# Altium PCB Soldering_Iron.PcbDoc
Units mm, origin at the board's own origin, x right, y up, seen from the top; angles counter-clockwise.
Board outline 141.5 x 41.5 mm, 2 copper layers (Top Layer, Bottom Layer); 49 components, 42 nets, 176 pads, 22 vias.
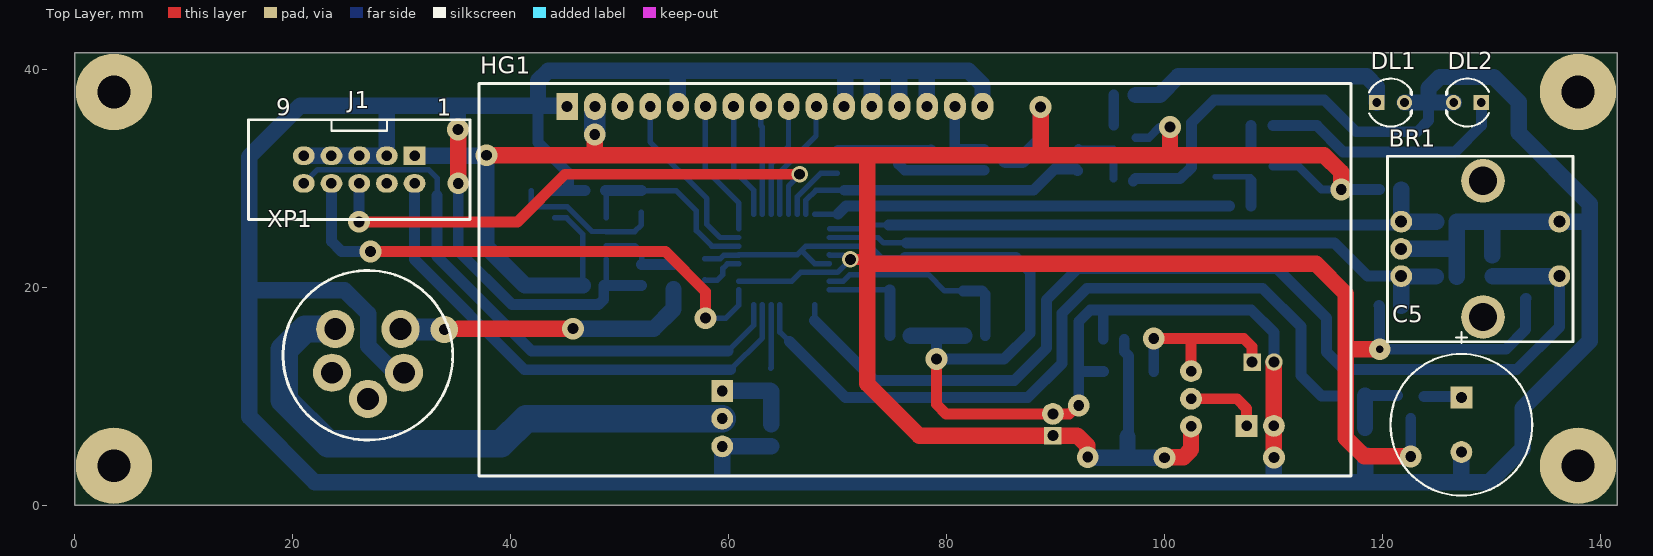
[diagram p0: Top Layer view]
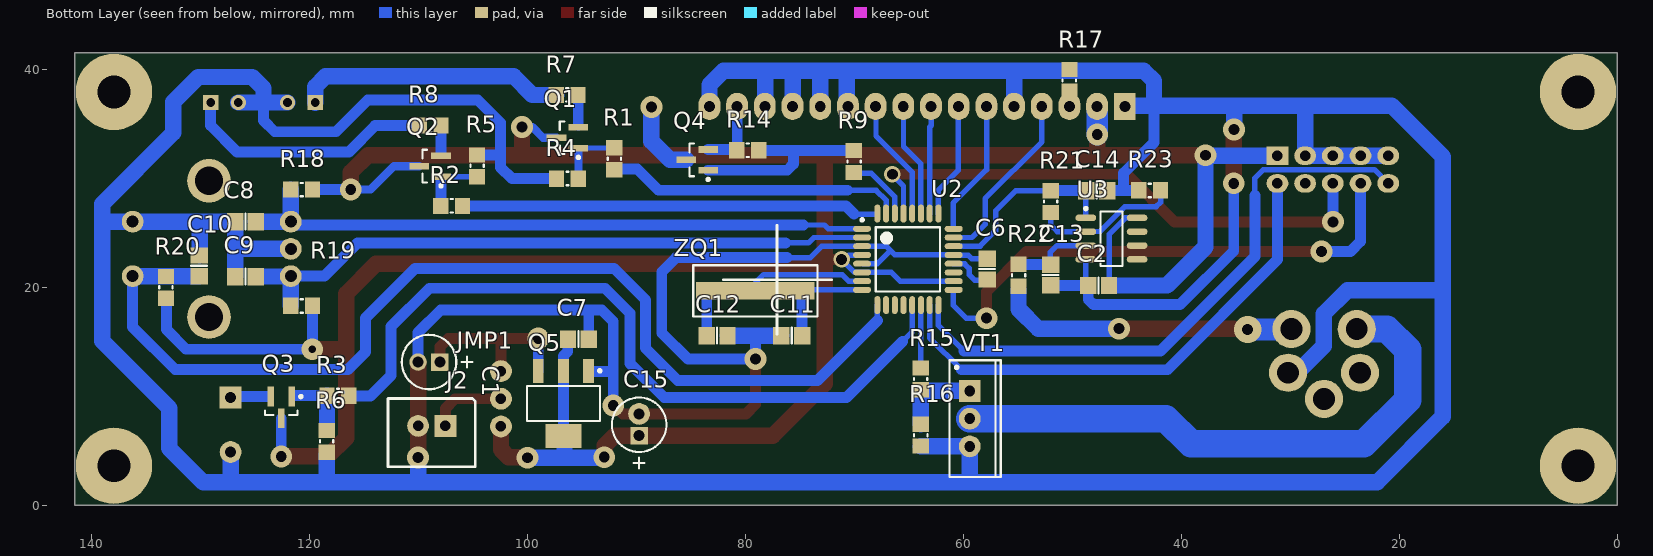
[diagram p1: Bottom Layer view, seen from below]
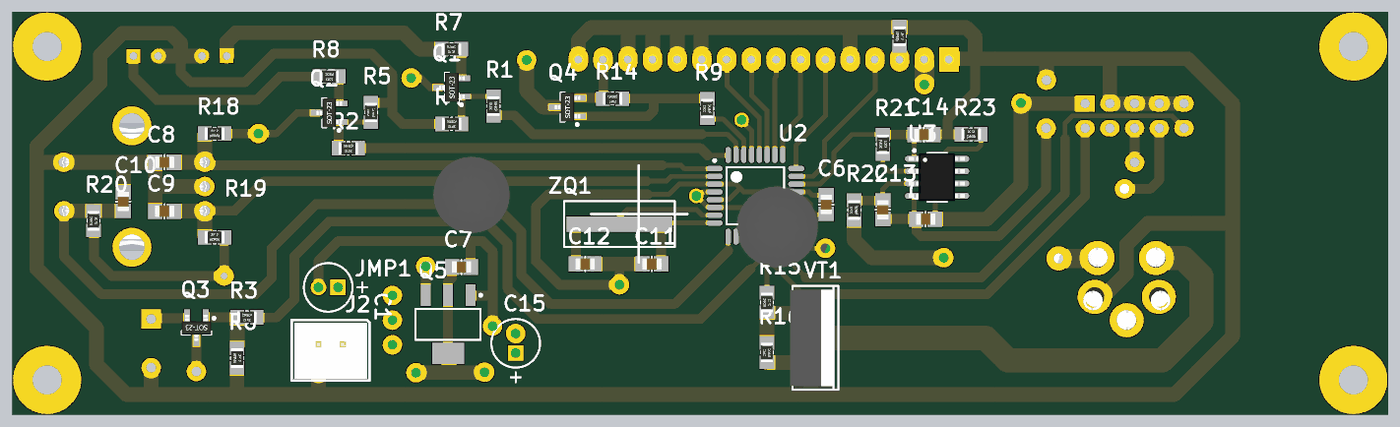
[diagram p2: 3D render of the assembled board from below, using the file's embedded part models]

## Layer stack, top to bottom
Top Solder: solder mask 0.0102, Solder Resist, Dk 3.5
Top Layer: signal copper 0.0356
Dielectric 1: dielectric 0.32, FR-4, Dk 4.8
Bottom Layer: signal copper 0.0356
Bottom Solder: solder mask 0.0102, Solder Resist, Dk 3.5

## Board outline
0,0 141.5,0 141.5,41.5 0,41.5

## Design rules (kind name [scope] priority, off if disabled: settings)
Clearance "Schematic Clearance Constraint" [InNet('NetVT1_2')] p1: gap=0.125 ignorepadtopadclearanceinfootprint=FALSE
Clearance [All] p2: gap=0.125 ignorepadtopadclearanceinfootprint=FALSE
HoleSize [All] p1: absolutevalues=TRUE maxlimit=5 minlimit=0.025 maxpercent=80.000 minpercent=20.000
HoleToHoleClearance [All] p1: gap=0.15 allowstackedmicrovias=TRUE
PolygonConnect [All] p1: connectstyle=Relief reliefconductorwidth=0.254 reliefentries=4 polygonreliefangle="90 Angle" airgapwidth=0.254
RoutingVias [All] p1: holewidth=0.711 width=1.27 viastyle="Through Hole" minholewidth=0.711 minwidth=1.27 maxholewidth=0.711 maxwidth=1.27
SolderMaskExpansion [All] p1: expansion=0.102
Width PWR [InNet('NetVT1_2')] p1: maxlimit=5 minlimit=1 preferedwidth=2
Width [All] p2: maxlimit=10 minlimit=0.125 preferedwidth=1
28 further rules are at their usual default settings.

## Classes and differential pairs
net class PWR: +5 GND NetVT1_2 VCC
component class Sheet_Soldering_Iron: BR1 C1 C6 C7 C8 C9 C10 C11 C12 C15 J1 J2 JMP1 Q5 R17 R18 R19 R20 U2 ZQ1
component class Led_And_Sound: DL2 Q1 Q2 Q3 Q4 R1 R2 R3 R4 R5 R6 R7 R8 R9 R14 R15 R16 VT1
component class Amplifier_For_Term: C2 C13 C14 R21 R22 R23 U3

## Components (designator, comment, footprint, x,y, rotation, side; value= is the part's Value field where it differs from the comment)
BR1 "Encoder" PCBComponent_1#1 129.18,23.5 r270 top
C1 "ECAP-511" ECAP511#1 108,13.12 r0 bottom value=100uF
C2 "CAPC_0805" CAPC2012-0805M 47.575,20.145 r180 bottom value=0.1uF
C5 "ECAP-1325" ECAP1325 127.2,9.87 r270 top value=1uF
C6 "CAPC_0805" CAPC2012-0805M 57.8,21.645 r270 bottom value=0.1uF
C7 "CAPC_0805" CAPC2012-0805M 95.3,15.22 r0 bottom value=0.1uF
C8 "CAPC_0805" CAPC2012-0805M 125.83,26 r180 bottom value=10nF
C9 "CAPC_0805" CAPC2012-0805M 125.83,20.95 r180 bottom value=10nF
C10 "CAPC_0805" CAPC2012-0805M 130.075,21.95 r270 bottom value=10nF
C11 "CAPC_0805" CAPC2012-0805M 75.725,15.545 r180 bottom value=22pF
C12 "CAPC_0805" CAPC2012-0805M 82.575,15.545 r0 bottom value=22pF
C13 "CAPC_0805" CAPC2012-0805M 51.975,21.107 r90 bottom value=0.1uF
C14 "CAPC_0805" CAPC2012-0805M 47.75,28.845 r0 bottom value=0.1uF
C15 "ECAP-511" ECAP511#2 89.725,6.37 r90 bottom value=10uF
DL1 "LED_D3_TH" LED_D3_TH 119.435,36.92 r0 top value=Red
DL2 "LED_D3_TH" LED_D3_TH 129.025,36.923 r180 top value=Red
HG1 "дисплей 16 сиволов на 2 строки" PCBComponent_1#2 77.075,20.67 r0 top
J1 "IDC10-2.54-SB" IDC10-2.54-SB 33.715,34.585 r0 top
J2 "CWF-2" CWF-2 107.5,7.27 r270 bottom
JMP1 "JMP3_2.54" JMP3_2.54 102.4,12.295 r180 bottom
Q1 "BC817" SOT23-3M 96.3,33.695 r0 bottom
Q2 "BC817" SOT23-3M 108.901,31.09 r0 bottom
Q3 "BC817" SOT23-3M 122.55,8.957 r270 bottom
Q4 "BC817" SOT23-3M 84.4,31.67 r0 bottom
Q5 "BCP56" SOT223_N 96.675,9.32 r270 bottom
R1 "RESC_0805_R" RESC2012-0805M 92,31.77 r90 bottom value=1k
R2 "RESC_0805_R" RESC2012-0805M 106.925,27.44 r0 bottom value=1k
R3 "RESC_0805_R" RESC2012-0805M 117.35,10.045 r0 bottom value=1k
R4 "RESC_0805_R" RESC2012-0805M 96.3,29.945 r0 bottom value=1k
R5 "RESC_0805_R" RESC2012-0805M 104.6,31.115 r90 bottom value=1k
R6 "RESC_0805_R" RESC2012-0805M 118.375,5.845 r270 bottom value=1k
R7 "RESC_0805_R" RESC2012-0805M 96.325,37.62 r0 bottom value=1k
R8 "RESC_0805_R" RESC2012-0805M 108.901,34.815 r0 bottom value=1k
R9 "RESC_0805_R" RESC2012-0805M 70.025,31.52 r90 bottom value=1k
R14 "RESC_0805_R" RESC2012-0805M 79.762,32.537 r0 bottom value=1k
R15 "RESC_0805_R" RESC2012-0805M 63.9,11.57 r270 bottom value=100
R16 "RESC_0805_R" RESC2012-0805M 63.9,6.42 r90 bottom value=1k
R17 "RESC_0805_R" RESC2012-0805M 50.255,38.954 r270 bottom value=2k
R18 "RESC_0805_R" RESC2012-0805M 120.68,28.95 r180 bottom value=100k
R19 "RESC_0805_R" RESC2012-0805M 120.675,18.275 r180 bottom value=100k
R20 "RESC_0805_R" RESC2012-0805M 133.125,19.975 r270 bottom value=100k
R21 "RESC_0805_R" RESC2012-0805M 51.975,27.845 r270 bottom value=130k
R22 "RESC_0805_R" RESC2012-0805M 54.925,21.082 r90 bottom value=10k
R23 "RESC_0805_R" RESC2012-0805M 42.9,28.87 r180 bottom value=1k
U2 "ATmega88A-AU" 32A_N 65.075,22.545 r180 bottom
U3 "LM358AM" SO-8_L 46.4,24.445 r180 bottom
VT1 "IRFZ48" TO-220 59.4,7.93 r270 bottom
XP1 "Connector" PCBComponent_1#3 26.9,13.745 r0 top
ZQ1 "Quartz HC49SMD" HC-49SMD 79.065,19.645 r0 bottom value=14.74M

## Footprints (in the part's own frame and the unit in brackets; to place one, negate y for a bottom-side part, rotate by r counter-clockwise, add the part's x,y. Pads: shape width x height; smd on the part's side, far side on the other; paste and mask are expansions set on the pad)
32A_N [mm] "Thin QFP, 32-Leads, Body 7x7mm, Pitch 0.8mm, IPC Medium Density"
  oval 1.65x0.55 smd: 1(-4.2,2.8) 2(-4.2,2) 3(-4.2,1.2) 4(-4.2,0.4) 5(-4.2,-0.4) 6(-4.2,-1.2) 7(-4.2,-2) 8(-4.2,-2.8) 17(4.2,-2.8) 18(4.2,-2) 19(4.2,-1.2) 20(4.2,-0.4) 21(4.2,0.4) 22(4.2,1.2) 23(4.2,2) 24(4.2,2.8)
  oval 0.55x1.65 smd: 9(-2.8,-4.2) 10(-2,-4.2) 11(-1.2,-4.2) 12(-0.4,-4.2) 13(0.4,-4.2) 14(1.2,-4.2) 15(2,-4.2) 16(2.8,-4.2) 25(2.8,4.2) 26(2,4.2) 27(1.2,4.2) 28(0.4,4.2) 29(-0.4,4.2) 30(-1.2,4.2) 31(-2,4.2) 32(-2.8,4.2)
  silkscreen extent -4.33,-2.95 2.95,3.75, body extent -3.5,-3.5 3.5,3.5, height 1.2
CAPC2012-0805M [mm] "Chip Capacitor, Body 2.0x1.3mm, IPC Low Density"
  rect 1.5x1.6 smd: 1(-0.95,0) 2(0.95,0)
  silkscreen extent 0,-0.72 0,0.72, body extent -1,-0.6 1,0.6, height 0.95
CWF-2 [mm]
  rect 2x2 hole 0.965: 1(0,0)
  round 2 hole 0.965: 2(0,-2.5)
  silkscreen extent -2.5,-5.25 3.75,2.75, body extent -2.2,-5 3.55,2.5, height 7
ECAP511#1 [mm] "Electrolytic capacitor D 5mm H 11mm"
  rect 1.6x1.6 hole 1: 1(0,0)
  round 1.6 hole 1: 2(2,0)
  silkscreen extent -3,-2.5 3.5,2.5, body extent -1.51,-2.49 3.49,2.5, height 11
ECAP511#2 [mm] "Electrolytic capacitor D 5mm H 11mm"
  rect 1.6x1.6 hole 1: 1(0,0)
  round 2 hole 1: 2(2,0)
  silkscreen extent -3,-2.5 3.5,2.5, body extent -1.51,-2.49 3.49,2.5, height 11
ECAP1325 [mm] "Electrolytic capacitor D 13mm H 25mm"
  rect 2x2 hole 1: 1(0,0)
  round 2 hole 1: 2(5,0)
  silkscreen extent -6,-6.5 9,6.5, body extent -4.05,-6.51 8.95,6.49, height 25
HC-49SMD [mm] "Quartz Crystal, SMT; 2 Leads; Body 11.35 x 4.65 x 13.46 mm (LxWxH max)"
  rect 6x1.6 smd: 1(-2.44,0) 2(2.44,0)
  silkscreen extent -5.7,-2.35 5.7,2.35, body extent -5.75,-2.25 5.75,2.25, height 4
IDC10-2.54-SB [mm] "IDC10 2.54 mm pitch, Straight, plastic Box"
  rect 2x1.7 hole 0.965: 1(-2.54,-2.54)
  oval 2x1.7 hole 0.965: 2(-2.54,-5.08) 3(-5.08,-2.54) 4(-5.08,-5.08) 5(-7.62,-2.54) 6(-7.62,-5.08) 7(-10.16,-2.54) 8(-10.16,-5.08) 9(-12.7,-2.54) 10(-12.7,-5.08)
  silkscreen extent -17.78,-8.38 2.54,0.76, body extent -17.78,-8.38 2.54,0.76, height 8.38
JMP3_2.54 [mm] "2 way jumper 2.54 mm"
  round 2 hole 0.965: 1(0,0) 2(0,-2.54) 3(0,-5.08)
  body extent -1.27,-6.35 1.27,1.27, height 7.62
LED_D3_TH [mm] "Through hole LED"
  rect 1.4x1.4 hole 0.8: 1(0,0)
  round 1.4 hole 0.8: 2(2.54,0)
  silkscreen extent -0.71,-2.2 3.24,2.2, body extent -0.33,-1.6 2.87,1.6, height 6.6
PCBComponent_1#1 [mm]
  round 2 hole 1.1: 1(-2.5,-7.5) 2(0,-7.5) 3(2.5,-7.5) 4(-2.5,7) 5(2.5,7)
  round 4 hole 2.6: HOLE(-6.25,0) HOLE(6.25,0)
  silkscreen extent -8.5,-8.75 8.52,8.25, body extent -6.55,-7.73 6.55,11, height 32.6
PCBComponent_1#2 [mm]
  rect 2x2.5 hole 1: 1(-31.9,15.9)
  oval 2x2.5 hole 1: 2(-29.36,15.9) 3(-26.82,15.9) 4(-24.28,15.9) 5(-21.74,15.9) 6(-19.2,15.9) 7(-16.66,15.9) 8(-14.12,15.9) 9(-11.58,15.9) 10(-9.04,15.9) 11(-6.5,15.9) 12(-3.96,15.9) 13(-1.42,15.9) 14(1.12,15.9) 15(3.66,15.9) 16(6.2,15.9)
  silkscreen extent -40,-18 40,18, body extent -39.88,-18.03 40.12,17.97, height 11.05
PCBComponent_1#3 [mm]
  round 3.5 hole 2: 1(-3,2.4) 2(-3.3,-1.6) 3(0,-4) 4(3.3,-1.6) 5(3,2.4)
  silkscreen extent -7.78,-7.78 7.78,7.78, body extent -9.5,-10.97 9.5,10.97, height 17
RESC2012-0805M [mm] "Chip Resistor, Body 2.0x1.3mm, IPC Low Density"
  rect 1.4x1.5 smd: 1(-1,0) 2(1,0)
  silkscreen extent -0.1,-0.63 0.1,0.6, body extent -1,-0.62 1,0.63, height 0.45
SO-8_L [mm] "SOIC, 8-Leads, Body 4.9x3.9mm, Pitch 1.27mm, IPC High Density"
  oval 1.9x0.6 smd: 1(-2.35,1.905) 2(-2.35,0.635) 3(-2.35,-0.635) 4(-2.35,-1.905) 5(2.35,-1.905) 6(2.35,-0.635) 7(2.35,0.635) 8(2.35,1.905)
  silkscreen extent -2.48,-2.5 1,2.88, body extent -2.9,-2.44 2.88,2.46, height 1.45
SOT23-3M [mm] "SOT23, 3-Leads, Body 2.9x1.3mm, Pitch 0.95mm, Lead Span 2.5mm, IPC Low Density"
  rect 1.8x0.6 smd: 1(-1,0.95) 2(-1,-0.95) 3(1,0)
  silkscreen extent -1.12,-1.5 0.7,1.92, body extent -1.32,-1.5 1.32,1.5, height 1.08
SOT223_N [mm] "SOT223, 4-Leads, Body 6.5x3.5mm, Pitch 2.3mm, Lead Span 7mm, IPC Medium Density"
  rect 2.2x1 smd: 1(-3,2.3) 2(-3,0) 3(-3,-2.3)
  rect 2.2x3.3 smd: 4(3,0)
  silkscreen extent -3.12,-3.35 1.6,3.47, body extent -1.85,-3.35 1.85,3.35, height 1.8
TO-220 [mm] "TO, Thru-Hole, Vertical, Heatsink Mounted; 3 In-Line Leads; Pitch 2.54 mm"
  rect 2x2 hole 1: 1(-2.54,0)
  round 2 hole 1: 2(0,0) 3(2.54,0)
  silkscreen extent -5.35,-1.85 5.35,2.85, body extent -4.95,-2.11 4.95,2.39, height 22.8

## Part data
BR1: library part EC11, "Энкодер с кнопкой"
C1 C15: "Capacitor electrolytic 2.5 mm pitch, 5*11 body"
C2 C6 C7 C8 C9 C10 C11 C12 C13 C14: "Capacitor 0805"
C5: "Capacitor electrolytic 5 mm pitch, 13*25 body"
DL1 DL2: "LED Through hole D3mm"
HG1: library part LCD1602, HelpURL=https://cdn-shop.adafruit.com/datasheets/TC1602A-01T.pdf
J1: "IDC10 2.54 mm pitch Straight, plastic Box", LatestRevisionDate=17-Jul-2002, LatestRevisionNote="Re-released for DXP Platform.", Publisher="Altium Limited"
JMP1: "2.54mm 3-pin \"switching\" jumper"
Q1 Q2 Q3 Q4: "BC817 NPN Transistor"
Q5: "NPN Medium Power Transistor", ComponentLink1Description="Manufacturer Link", ComponentLink1URL=http://www.semiconductors.philips.com/, ComponentLink2Description=Datasheet, ComponentLink2URL=http://www.semiconductors.philips.com/acrobat/datasheets/BC639_BCP56_BCX56_7.pdf, DatasheetVersion=10-Oct-2001, LatestRevisionDate=12-Dec-2006, LatestRevisionNote="IPC-7351 Footprint Added.", PackageDescription="4-Pin SOT-223 Package 2.3 mm Pitch, 7 mm Lead Span", PackageReference=SOT223, PackageVersion=Aug-2001, Published=17-Sep-2003, Publisher="Altium Limited"
R1 R2 R3 R4 R5 R6 R7 R8 R9 R14 R15 R16 R17 R18 R19 R20 R21 R22 R23: "Resistor 0805"
U2: "8-bit AVR Microcontroller, 8KB Flash, 512 Bytes EEPROM, 1KB SRAM, 32-pin TQFP, Industrial Grade (-40°C to 85°C)", Supplier Part Number 1=ATMEGA88A-AU-ND, Code_JEDEC=MS-026-ABA, ComponentLink1Description="Manufacturer Link", ComponentLink1URL=http://www.atmel.com/products/avr/default.asp?, ComponentLink2Description="ATmega48A/48PA/88A/88PA/168A/168PA/328/328P Datasheet", ComponentLink2URL=http://www.atmel.com/dyn/resources/prod_documents/8271.pdf, ComponentLink3Description="ATmega48A/48PA/88A/88PA/168A/168PA/328/328P Summary", ComponentLink3URL=http://www.atmel.com/dyn/resources/prod_documents/8271S.pdf, ComponentLink4Description="Atmel.com Home", ComponentLink4URL=http://www.atmel.com, DatasheetVersion="revA, Jan-2010", PackageDescription="32-Lead, 7x7x1.0 mm Body, 0.8mm Lead Pitch, Thin Profile Plastic Quad Flat Package (TQFP)", PackageReference=32A, PackageVersion="revB, Oct-2001", Published=1-Apr-2010, Publisher="Altium Limited", Supplier 1=Digi-Key, Supplier 2=Mouser, Supplier Part Number 2=556-ATMEGA88A-AU
U3: "Low Power Dual Operational Amplifier", DigiKeyPartNumber=LM358AMXCT-ND, Manufacturer="National Semiconductor", PackageTopMarking=NSZXTT*LM*358AM, PowerWise=N, Code_IPC=SOIC127P600-8, Code_JEDEC=MS-012-AA, ComponentLink1Description="LM358 Datasheet", ComponentLink1URL=http://www.national.com/ds/LM/LM358.pdf, ComponentLink2Description="LM358 Web Page", ComponentLink2URL=http://www.national.com/pf/LM/LM358.html, ComponentLink3Description="M08A Package Page", ComponentLink3URL=http://www.national.com/packaging/folders/m08a.html, CompType=Amplifiers, DatasheetVersion=Oct-2005, LatestRevisionDate=13-Jan-2009, LatestRevisionNote="Sim Model Added.", PackageDescription="SOIC Narrow, 4.9 x 3.9 x 1.45mm, 8 Lead, 1.27mm Pitch", PackageReference=M08A, PackageVersion="revL, Sep-2006", PartNumber=LM358AM, PinCount=8, Published=4-Dec-2008, Publisher="Altium Limited", RoHS=O
VT1: "HEXFET N-Channel Power MOSFET", ComponentLink1Description="Manufacturer Link", ComponentLink1URL=http://www.irf.com/, ComponentLink2Description=Datasheet, ComponentLink2URL=http://www.irf.com/product-info/datasheets/data/irfz48.pdf, DatasheetVersion=PD-9.758, LatestRevisionDate=17-Jul-2002, LatestRevisionNote="Re-released for DXP Platform.", Note="Pin 2 is electrically connected to pin 4.", PackageDescription="TO, Thru-Hole, Vertical, Heatsink Mounted; 3 In-Line Leads; Pitch 2.54 mm", PackageReference=TO-220AB, PackageVersion=Feb-1997, Published=8-Jun-2000, Publisher="Altium Limited"
XP1: library part GX16-5, "Разъём с 5 контактами типа мама"

## Free pads (board coordinates)
  round 7 hole 3: 1(3.6,3.6) 1(3.6,37.9) 1(137.9,3.6) 1(137.9,37.9)

## Via types
v1: diameter 2, hole 1, Top Layer to Bottom Layer, 18 vias
v2: diameter 1.5, hole 1, Top Layer to Bottom Layer, 2 vias
v3: diameter 2.5, hole 1, Top Layer to Bottom Layer, 1 vias
v4: diameter 2, hole 0.711, Top Layer to Bottom Layer, 1 vias

## Nets (pads, with @x,y where several pads share a name; then routed paths per layer and width w, separated by ;. In a path a pad name is that pad's centre, name@x,y a point inside that pad or via, vN(x,y) a via of type N, cw(c..) or ccw(c..) an arc to the next point about the centre after c; other vN are vias at no path point)
+5: C2.2 C7.2 C15.1 HG1.2 J1.1 JMP1.3 Q1.3 Q2.3 Q3.3 Q4.3 Q5.2 Q5.4 R18.2 R19.2 R20.2 U2.4 U2.6 U2.18 U3.8 | length 320.1
  Top Layer w1: v2(71.15,22.54) 72.145,22.54
  Top Layer w1.5: v1(37.775,32.095) 47.8,32.095 ; v1(47.701,33.985) 47.701,32.194 47.8,32.095 ; v1(88.6,36.52) 88.6,32.095 ; v1(92.925,4.397) 92.873,4.448 92.873,5.472 91.975,6.37 C15.1 77.475,6.37 72.7,11.145 72.7,22.145 ; v1(99.975,4.345) 100.027,4.397 101.702,4.397 102.4,5.095 JMP1.3 ; v1(100.475,34.67) 100.475,32.37 100.675,32.17 ; v1(116.175,28.95) 116.175,30.52 114.6,32.095 88.6,32.095 ; v4@119.688,14.3 116.6,14.3 ; v1(122.55,4.47) 118.28,4.47 116.6,6.15 116.6,14.3 ; 47.8,32.095 72.7,32.095 ; 72.7,22.145 113.855,22.145 116.6,19.4 116.6,14.3 ; 72.7,22.145 72.7,32.095 ; 72.7,32.095 88.6,32.095
  Bottom Layer w0.5: U3.8 45.12,26.35 46.6,24.87 C2.2@46.6,20.495 ; U2.18@60.925,20.545 65.775,20.545 66.575,21.345 69.225,21.345 69.235,21.355 69.965,21.355 v2(71.15,22.54) ; U2.4@69.225,22.945 69.235,22.935 70.484,22.935 ; Q3.3@122.55,7.695 Q3.3
  Bottom Layer w0.75: C7.2 C7.2@96.275,15.195 ; Q5.4@96.575,6.27 Q5.4@96.675,6.37 ; Q1.3 98.545,33.695 99.52,34.67 v1(100.475,34.67) ; Q2.3 112.21,31.09 114.35,28.95 v1(116.175,28.95)
  Bottom Layer w1: C7.2@96.275,15.195 96.275,14.095 96.675,13.695 Q5.2 Q5.4@96.675,6.37 ; v1@116.25,28.95 R18.2 ; R19.2@119.655,18.295 R19.2 119.688,18.263 119.688,14.312 v4(119.7,14.3) 131.28,14.3 133.082,16.102 133.082,18.932 R20.2 ; v1(122.55,4.47) Q3.3
  Bottom Layer w1.5: J1.1 37.7,32.045 v1@37.775,31.97 ; v1(37.775,32.095) v1@37.775,31.97 ; C2.2 41.3,20.145 37.775,23.67 v1@37.775,31.97 ; HG1.2@47.701,36.386 47.8,36.485 HG1.2 ; Q4.3 86.9,31.67 88.6,33.37 v1(88.6,36.52) ; v1(92.925,4.397) 92.977,4.345 96.575,4.345 ; Q5.4@96.575,6.27 96.575,4.345 ; v1(99.975,4.345) 96.575,4.345
  Bottom Layer w2: v1(47.701,33.985) HG1.2@47.701,36.386
GND: BR1.2 BR1.4 C1.2 C2.1 C5.2 C6.1 C7.1 C8.1 C9.1 C10.1 C11.1 C12.1 C13.1 C14.1 C15.2 DL1.2 DL2.2 HG1.1 HG1.5 HG1.11 HG1.12 HG1.13 HG1.14 HG1.16 J1.3 J1.5 J1.7 J1.9 J2.2 Q5.1 R4.2 R5.2 R6.2 R16.1 R17.1 R23.1 U2.3 U2.5 U2.21 U3.4 VT1.3 XP1.4 | length 567
  Top Layer w1: v1(79.05,13.395) 79.05,9.256 79.936,8.37 C15.2 ; C15.2@89.725,8.345 91.227,8.345 92.027,9.145 v1(92.1,9.145)
  Top Layer w1.5: v1(35.154,34.442) 35.171,34.425 35.171,29.532 v1(35.187,29.515) ; v1(110,4.37) J2.2 C1.2
  Bottom Layer w0.5: U3.4 48.762,22.527 C2.1@48.762,20.232 ; C6.1 59.2,22.595 59.54,22.935 60.915,22.935 60.925,22.945 66.275,22.945 66.675,23.345 ; U2.5@69.225,22.145 69.215,22.155 67.865,22.155 66.675,23.345 ; U2.3@69.225,23.745 U2.3 72.965,23.745 74.015,22.695 76.15,22.695 ; U2.3@69.325,23.745 67.075,23.745 66.675,23.345
  Bottom Layer w0.75: 92.1,12.245 92.125,12.27 ; C7.1 C7.1@94.362,15.207 ; 94.35,17.845 94.4,17.895 ; Q5.1@94.362,12.282 Q5.1@94.375,12.27
  Bottom Layer w1: v1(35.187,29.515) 35.187,23.307 40.1,18.395 48.05,18.395 48.525,18.87 C2.1 48.531,20.151 51.969,20.151 C13.1 ; 42.5,36.645 42.5,33.245 45.3,30.445 45.3,28.857 ; R23.1 43.912,28.857 45.3,28.857 ; C14.1 46.787,28.857 45.3,28.857 ; HG1.5@55.328,36.563 HG1.5 ; HG1.5@55.328,36.817 HG1.5@55.48,36.665 ; 59.4,2.32 59.425,2.295 ; VT1.3 VT1.3@59.415,5.405 ; R16.1@63.885,5.405 R16.1 ; 76.15,22.695 86.35,22.695 87.65,21.395 87.65,15.795 85.25,13.395 v1(79.05,13.395) 79.05,15.545 ; C15.2 C15.2@89.84,8.485 ; v1(92.1,9.145) 92.1,12.245 92.1,16.845 93.15,17.895 94.4,17.895 107.925,17.895 110,15.82 C1.2 ; 92.125,12.27 Q5.1@94.375,12.27 ; C7.1 94.35,17.845 ; R4.2@97.1,29.745 R4.2 101.395,29.945 102.425,30.975 102.425,32.115 ; R5.2 102.425,32.115 ; 118.375,2.17 118.45,2.095 ; 124.175,36.924 124.175,35.275 123.15,34.25 117.545,34.25 114.62,37.175 104.525,37.175 102.425,35.075 102.425,32.115 ; 127.2,2.27 127.375,2.095
  Bottom Layer w1.5: J1.9 J1.7 J1.5 J1.3 28.635,36.595 ; XP1.4@29.325,11.745 XP1.4@30.364,11.745 ; XP1.4 29.375,12.145 26.925,14.595 26.925,17.545 24.75,19.72 16,19.72 ; v1(35.154,34.442) 35.154,35.866 ; HG1.1@45.3,36.645 42.5,36.645 ; HG1.5 55.328,36.577 55.328,36.817 55.328,39.853 ; 59.4,2.32 VT1.3 ; VT1.3@59.415,5.405 R16.1@63.885,5.405 ; HG1.11 70.671,36.666 70.671,39.733 70.79,39.853 ; HG1.12 73.101,36.584 73.101,39.853 ; HG1.13 75.641,36.584 75.641,39.853 ; C11.1 79.05,15.545 C12.1 ; HG1.14 78.156,36.609 78.156,39.853 ; HG1.16 83.275,38.569 81.991,39.853 78.156,39.853 ; 110,2.295 v1(110,4.37) ; 118.375,2.17 R6.2@118.375,4.645 ; BR1.2 126.78,23.5 ; DL1.2@121.975,36.924 124.175,36.924 ; DL2.2@126.485,36.924 124.175,36.924 ; C9.1 126.78,23.5 ; 127.2,2.27 C5.2 ; C10.1@130.025,22.9 130.025,25.875 130.15,26 ; 16,19.72 16,31.97 20.675,36.645 42.5,36.645 ; 16,19.72 16,8.12 22.025,2.095 59.4,2.095 110,2.095 118.45,2.095 127.375,2.095 129.72,2.095 132.825,5.2 132.825,8.9 138.975,15.05 138.975,26 ; 42.5,36.645 42.5,38.919 43.434,39.853 55.328,39.853 ; 55.328,39.853 70.79,39.853 ; 70.79,39.853 73.101,39.853 ; 73.101,39.853 75.641,39.853 ; 75.641,39.853 78.156,39.853 ; 124.175,36.924 124.175,38.245 125.2,39.27 130.155,39.27 132.45,36.975 132.45,34.15 138.975,27.625 138.975,26 ; 126.78,23.5 C8.1 130.15,26 ; 130.15,26 132.675,26 BR1.4 138.975,26
NetBR1_1: BR1.1 C8.2 R18.1 U2.1 | length 59
  Bottom Layer w0.5: U2.1 72.375,25.345 72.725,25.695 74.675,25.695
  Bottom Layer w1: 74.675,25.695 121.68,25.695 BR1.1
  Bottom Layer w1.5: R18.1 BR1.1 C8.2
NetBR1_3: BR1.3 C9.2 R19.1 U2.2 | length 59.9
  Bottom Layer w0.5: U2.2@69.225,24.545 U2.2 73.7,24.545 74.2,24.045 76.3,24.045
  Bottom Layer w0.75: C9.2@124.855,20.975 C9.2
  Bottom Layer w1: 76.3,24.045 115.555,24.045 118.6,21 BR1.3
  Bottom Layer w1.5: R19.1 121.675,20.995 BR1.3 121.705,20.975 C9.2@124.855,20.975
NetBR1_5: BR1.5 C10.2 R20.1 U2.9 | length 97
  Bottom Layer w0.5: 67.875,16.92 U2.9 U2.9@67.875,18.395
  Bottom Layer w1: 67.875,16.92 73.365,11.43 86.185,11.43 89.15,14.395 89.15,18.832 92.013,21.695 110.28,21.695 114.825,17.15 114.825,14.034 116.434,12.425 132.275,12.425 136.18,16.33 BR1.5
  Bottom Layer w1.5: C10.2 BR1.5
NetC1_1: C1.1 JMP1.1 Q5.3 | length 16.9
  Top Layer w1: v1(98.975,15.295) 102.286,15.295 ; JMP1.1 102.4,15.181 102.286,15.295 ; C1.1@107.925,13.195 C1.1 108,14.53 107.235,15.295 102.286,15.295
  Bottom Layer w1: Q5.3@98.975,12.27 v1(98.975,15.295)
NetC5_1: C5.1 Q3.2 | length 3.5
  Bottom Layer w0.5: C5.1@127.112,9.957 C5.1
  Bottom Layer w1: Q3.2@123.75,9.957 C5.1@127.112,9.957
NetC6_2: C6.2 U2.20 | length 4.1
  Bottom Layer w0.5: C6.2 57.85,20.645 58.95,20.645 59.45,21.145 59.45,21.72 59.865,22.135 60.915,22.135 U2.20@60.925,22.145
NetC11_2: C11.2 U2.8 ZQ1.1 | length 9.7
  Bottom Layer w0.5: U2.8@69.225,19.745 ZQ1.1@74.75,19.745
  Bottom Layer w1: ZQ1.1@74.75,19.745 74.775,19.72 C11.2
NetC12_2: C12.2 U2.7 ZQ1.2 | length 19.1
  Bottom Layer w0.5: U2.7@69.225,20.545 U2.7 70.5,20.545 71.1,21.145 78.3,21.145 79.8,19.645 ZQ1.2
  Bottom Layer w1: ZQ1.2 83.225,19.645 83.525,19.345 C12.2
NetC13_2: C13.2 R22.2 U3.3 | length 7.6
  Bottom Layer w0.5: U3.3 51.385,23.81 52,23.195 C13.2@52,22.082 ; C13.2@51.975,22.045 C13.2 C13.2@51.987,22.07
  Bottom Layer w1: C13.2 C13.2@51.987,22.07 ; C13.2@52,22.082 C13.2@51.987,22.07 ; R22.2 54.912,22.07 C13.2@51.987,22.07
NetC14_2: C14.2 R21.1 U2.22 U3.1 | length 17.9
  Bottom Layer w0.5: C14.2 48.75,28.795 U3.1 ; R21.1 52,28.82 52.025,28.845 55.16,28.845 57.025,26.98 57.025,25.169 58.449,23.745 U2.22 U2.22@60.925,23.745
  Bottom Layer w1: C14.2 R21.1
NetDL1_1: DL1.1 R7.2 | length 24.7
  Bottom Layer w1.5: R7.2 99.52,37.62 101.225,39.325 118.49,39.325 119.435,38.38 DL1.1
NetDL2_1: DL2.1 R8.2 | length 23.2
  Bottom Layer w1: R8.2 113.935,34.815 116.35,32.4 126.605,32.4 129.025,34.82 DL2.1
NetHG1_3: HG1.3 R17.2 | length 0.2
  Bottom Layer w1: HG1.3@50.225,36.8 HG1.3@50.38,36.645
NetHG1_4: HG1.4 U2.23 | length 16.5
  Bottom Layer w0.5: HG1.4@52.92,36.645 52.775,36.5 52.775,33.321 57.988,28.108 57.988,25.756 59.199,24.545 U2.23 U2.23@60.925,24.545
NetHG1_6: HG1.6 U2.24 | length 12.6
  Bottom Layer w0.5: HG1.6@58,36.645 57.85,36.495 57.85,30.771 60.925,27.696 U2.24@60.925,25.345
NetHG1_7: HG1.7 U2.25 | length 10.7
  Bottom Layer w0.5: HG1.7@60.54,36.645 60.45,36.555 60.45,30.731 62.275,28.906 U2.25@62.275,26.695
NetHG1_8: HG1.8 U2.26 | length 10.1
  Bottom Layer w0.5: U2.26@63.075,26.695 63.075,34.67 62.925,34.82 62.925,36.49 HG1.8@63.08,36.645
NetHG1_9: HG1.9 U2.27 | length 10.7
  Bottom Layer w0.5: U2.27@63.875,26.695 63.875,31.295 65.475,32.895 65.475,36.5 HG1.9@65.62,36.645
NetHG1_10: HG1.10 U2.28 | length 11.4
  Bottom Layer w0.5: U2.28@64.675,26.695 64.675,30.545 68,33.87 68,36.485 HG1.10@68.16,36.645
NetHG1_15: HG1.15 Q4.2 R14.2 | length 6.7
  Bottom Layer w0.5: R14.2 R14.2@80.795,32.57 ; R14.2@80.925,32.57 R14.2@80.975,32.62
  Bottom Layer w1: R14.2@80.725,32.57 HG1.15@80.725,36.51 ; HG1.15 80.725,36.56 HG1.15@80.725,36.51 ; HG1.15@80.86,36.645 HG1.15@80.725,36.51 ; R14.2@80.975,32.62 Q4.2
NetJ1_2: J1.2 U2.15 | length 47.3
  Bottom Layer w0.5: 60.151,12.421 63.075,15.345 U2.15 U2.15@63.075,18.395
  Bottom Layer w1: J1.2 31.175,22.52 41.274,12.421 60.151,12.421
NetJ1_6: J1.6 U2.29 | length 49.8
  Top Layer w1: v1(26.086,25.984) 40.614,25.984 44.983,30.353 v2(66.497,30.353)
  Bottom Layer w0.5: U2.29@65.475,26.695 65.475,29.262 66.497,30.284 v2(66.497,30.353)
  Bottom Layer w1: v1(26.086,25.984) 26.09,25.989 26.09,29.5 J1.6
NetJ1_8: J1.8 U2.17 | length 48.9
  Top Layer w1: v1(27.127,23.266) 54.179,23.266 57.875,19.57 v1(57.875,17.145)
  Bottom Layer w0.5: v1(57.875,17.145) 59.725,17.145 60.925,18.345 U2.17@60.925,19.745
  Bottom Layer w1: J1.8 23.555,24.197 24.486,23.266 v1(27.127,23.266)
NetJ1_10: J1.10 U2.16 | length 55.8
  Bottom Layer w0.5: J1.10 22.28,30.77 32.476,30.77 33.249,29.997 33.249,28.397 ; 59.928,14.148 62.275,16.495 U2.16@62.275,18.395
  Bottom Layer w1: 33.249,28.397 33.249,22.796 41.897,14.148 59.928,14.148
NetQ1_1: Q1.1 R1.2 R4.1 | length 6
  Bottom Layer w0.5: R1.2 92.012,32.757 95.287,32.757 Q1.1
  Bottom Layer w0.75: R1.2@92,32.67 R1.2@92.075,32.745 ; R4.1 Q1.1@95.3,32.495
NetQ1_2: Q1.2 R7.1 | length 2.8
  Bottom Layer w0.75: Q1.2@95.3,34.87 Q1.2@95.312,34.882 ; R7.1@95.312,37.607 R7.1
  Bottom Layer w1: Q1.2@95.312,34.882 R7.1@95.312,37.607
NetQ2_1: Q2.1 R2.2 R5.1 | length 5.6
  Bottom Layer w0.5: R5.1 104.612,30.127 107.888,30.127 Q2.1
  Bottom Layer w0.75: R2.2@107.913,27.452 R2.2
  Bottom Layer w1: R2.2@107.913,27.452 107.913,29.753
NetQ2_2: Q2.2 R8.1 | length 2.5
  Bottom Layer w1: 107.901,32.34 R8.1
NetQ3_1: Q3.1 R3.2 R6.1 | length 5.9
  Bottom Layer w1: R3.2 Q3.1@121.325,10.045
  Bottom Layer w1.5: R6.1@118.35,7.095 R3.2
NetQ4_1: Q4.1 R9.2 R14.1 | length 18
  Bottom Layer w1: R9.2@69.95,32.445 R9.2 70.05,32.545 75.6,32.545 ; R14.1@78.55,32.57 78.525,32.545 75.6,32.545 ; Q4.1 76.136,30.72 75.55,31.306 75.55,32.495 75.6,32.545
NetR1_1: R1.1 U2.31 | length 27.4
  Bottom Layer w0.5: U2.31@67.075,26.695 U2.31 67.075,27.97 67.985,28.88 70.6,28.88
  Bottom Layer w1: 70.6,28.88 87.96,28.88 89.9,30.82 91.85,30.82 R1.1@92,30.67
NetR2_1: R2.1 U2.32 | length 38.4
  Bottom Layer w0.5: U2.32@67.875,26.695 70,26.695
  Bottom Layer w1: 70,26.695 70.745,27.44 R2.1
NetR3_1: R3.1 U2.13 | length 70.9
  Bottom Layer w0.5: U2.13@64.675,18.395 U2.13 64.675,15.87 65.85,14.695 65.875,14.695 66.15,14.695
  Bottom Layer w1: 65.575,14.995 65.875,14.695 70.7,9.87 87.425,9.87 90.55,12.995 90.55,17.595 92.85,19.895 108.95,19.895 112.475,16.37 112.475,11.895 114.35,10.02 R3.1@116.275,10.02
NetR9_1: R9.1 U2.30 | length 6.2
  Bottom Layer w0.5: U2.30@66.275,26.695 U2.30 66.275,28.277 68.418,30.42 69.925,30.42 R9.1@69.95,30.445
NetR15_1: R15.1 U2.14 | length 5.8
  Bottom Layer w0.5: R15.1@63.865,12.57 63.875,12.58 U2.14@63.875,18.395
NetR15_2: R15.2 R16.2 VT1.1 | length 7.9
  Bottom Layer w1: VT1.1@59.1,10.77 VT1.1 ; R15.2@63.812,10.482 R15.2@63.825,10.495
  Bottom Layer w1.5: VT1.1 59.412,10.482 R15.2@63.812,10.482 ; R16.2 R15.2@63.9,10.42
NetR21_2: R21.2 R23.2 U3.2 | length 13.7
  Bottom Layer w0.5: R23.2@41.9,28.845 41.9,27.77 42.3,27.37 45.175,27.37 47.446,25.099 48.731,25.099 U3.2 51.36,25.08 51.975,25.695 R21.2
NetR22_1: R22.1 XP1.5 | length 26.3
  Top Layer w1.5: 35.187,16.182 v1(45.717,16.182)
  Bottom Layer w1.5: v1(45.717,16.182) 53.127,16.182 54.925,17.981 R22.1@54.925,19.795
  Bottom Layer w2: XP1.5 29.941,16.104 v3(33.909,16.104)
NetVT1_2: VT1.2 XP1.1 | length 53.1
  Bottom Layer w2.5: XP1.1@23.709,15.954 XP1.1 21.125,16.145 19.225,14.245 19.225,9.645 23.25,5.62 39.1,5.62 41.41,7.93 VT1.2
VCC: J2.1 JMP1.2 | length 7.1
  Top Layer w1: JMP1.2 106.615,9.755 107.5,8.87 J2.1
pads on no net: BR1.HOLE J1.4 U2.10 U2.11 U2.12 U2.19 U3.5 U3.6 U3.7 XP1.2 XP1.3

## Text inside footprints (layer, text, board x,y; h text height)
J1: Top Overlay "1" at 33.207,35.728 h1.52; Top Overlay "9" at 18.475,35.728 h1.52